# Altium PCB Export_PCB.PcbDoc (part 2 of 7)
Units mm, origin at the board's own origin, x right, y up, seen from the top; angles counter-clockwise.
Board outline 93 x 90 mm, 6 copper layers (Top_1, GND_2, SIGNAL_3, PWR_4, GND_5, Bottom_6), stack 1.606 mm thick; 470 components, 374 nets, 2145 pads, 1031 vias.
Unrouted connection lines stored in the file: 451.
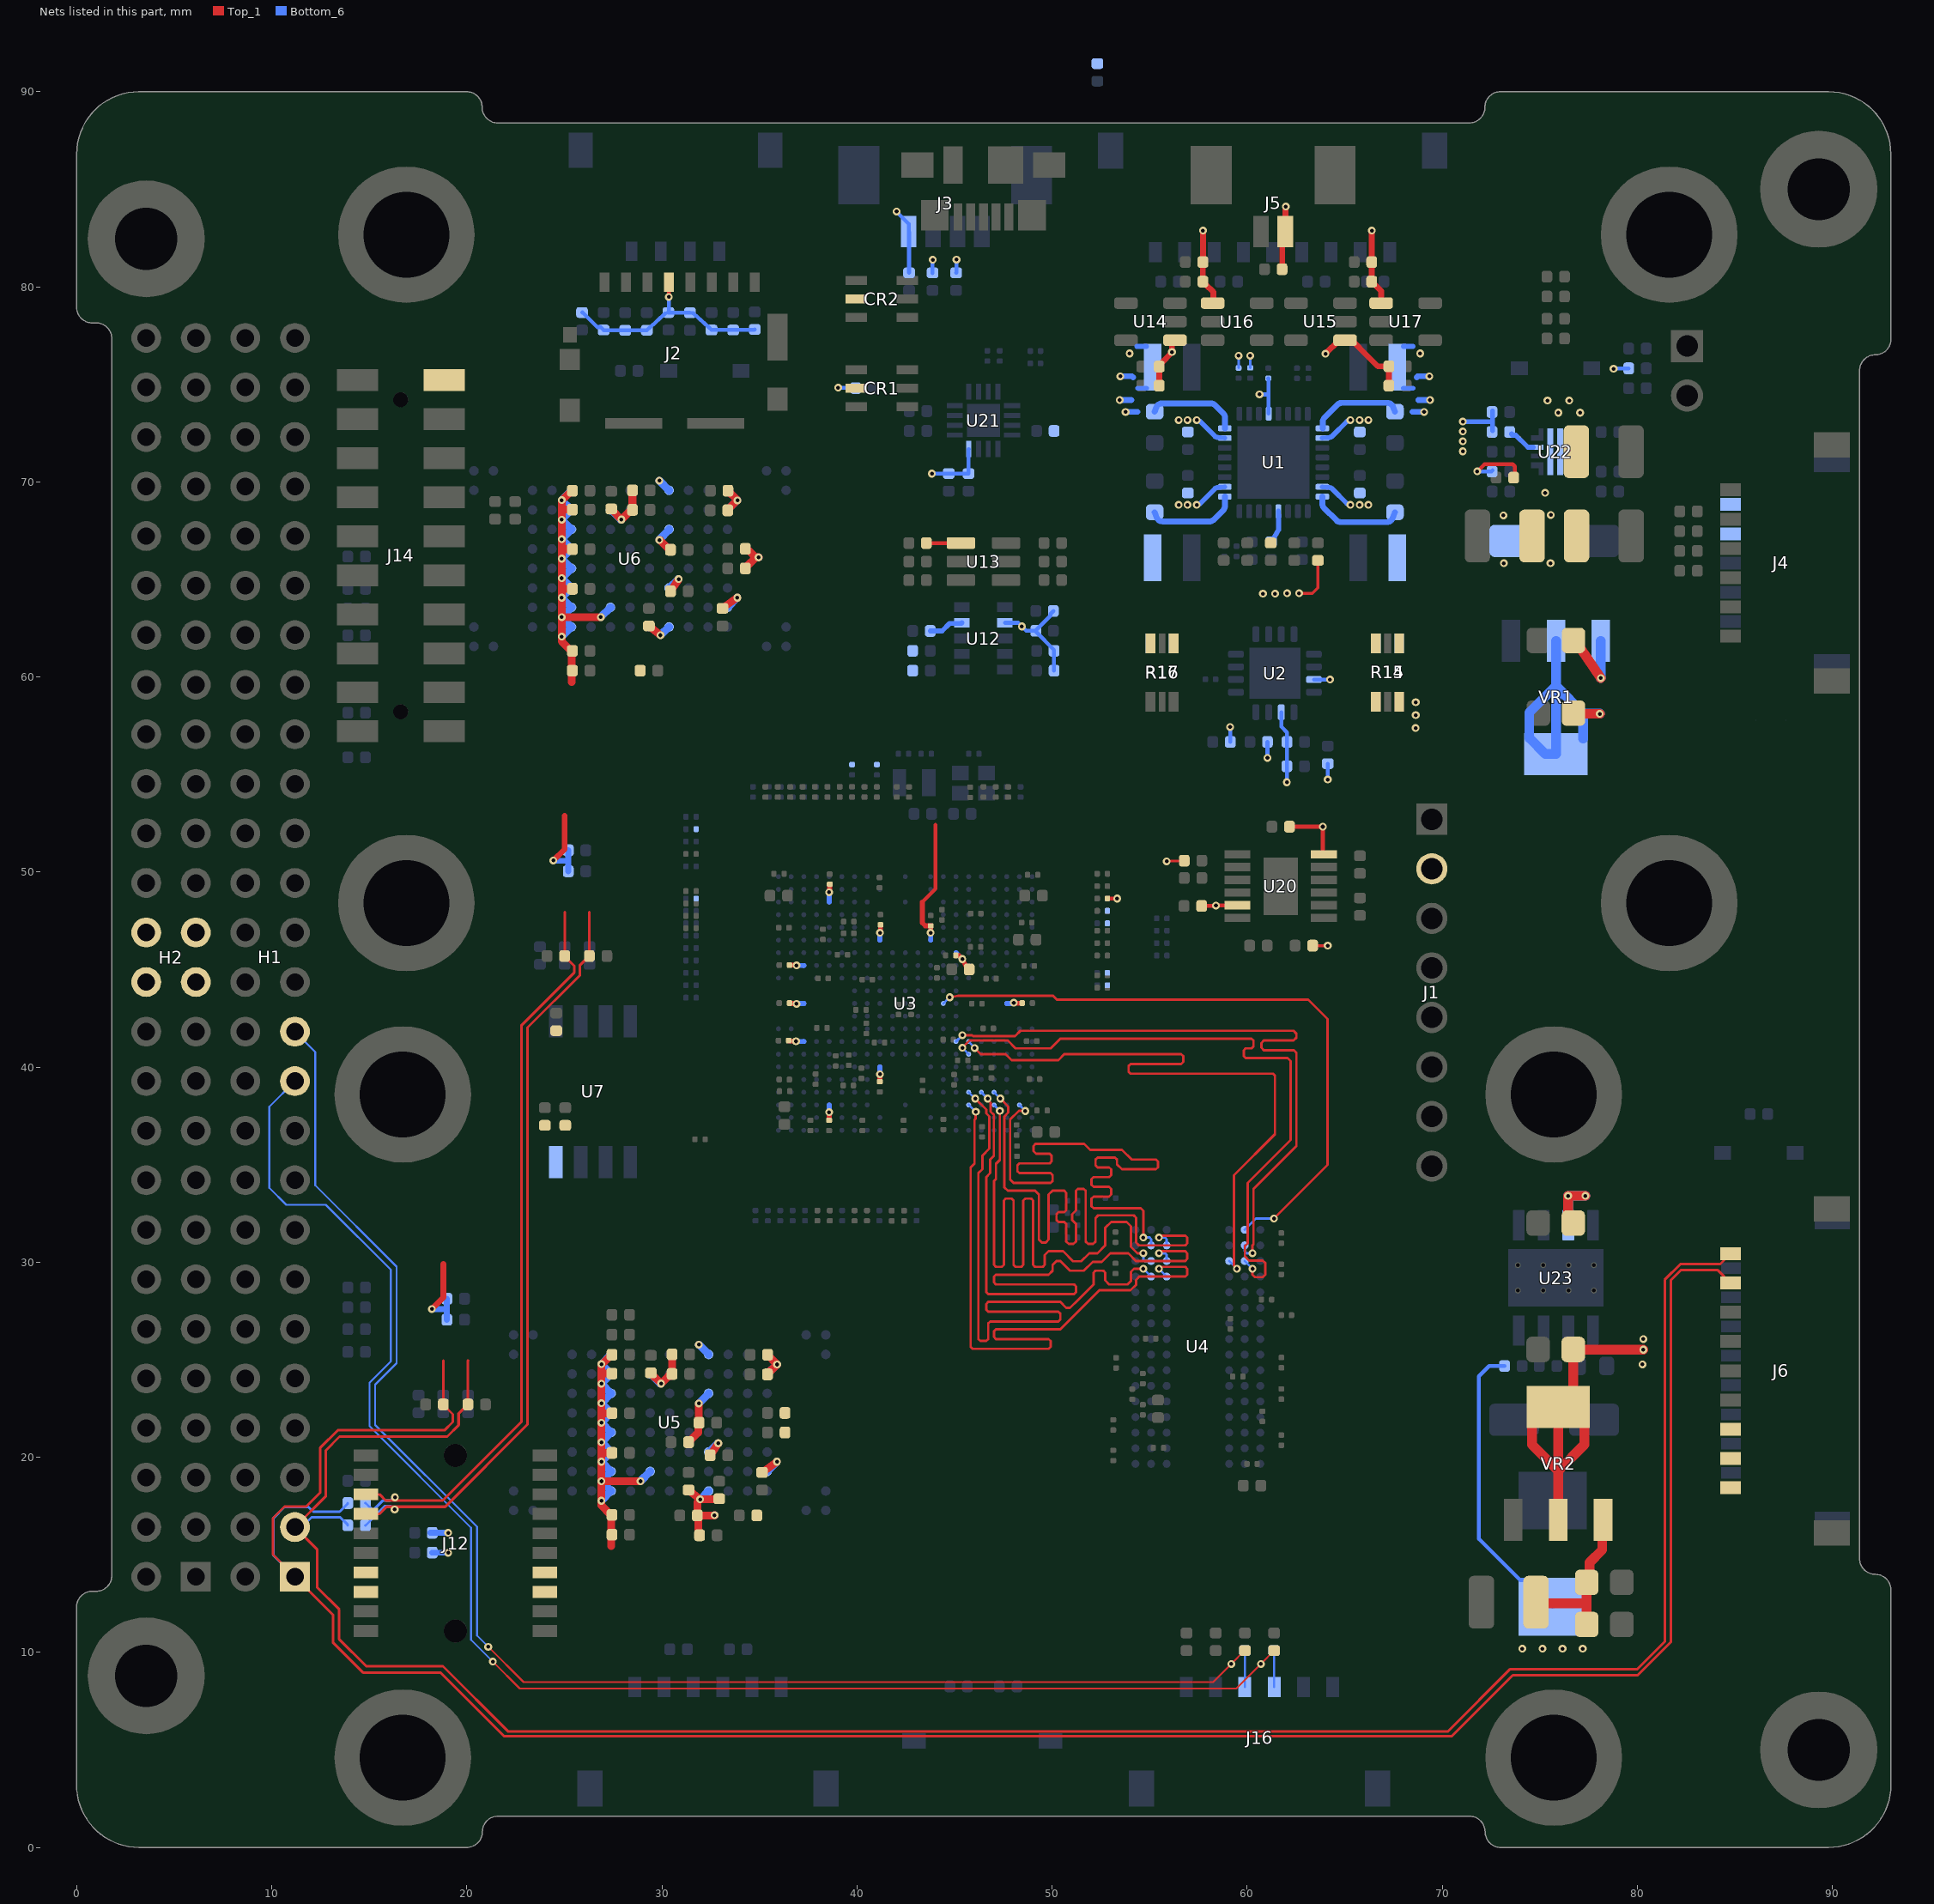
[diagram p5: the nets of this part, all layers, seen from the top]

## Footprints (in the part's own frame and the unit in brackets; to place one, negate y for a bottom-side part, rotate by r counter-clockwise, add the part's x,y. Pads: shape width x height; smd on the part's side, far side on the other; paste and mask are expansions set on the pad) (continued)
SAMTEC_ESQ-126-14-G-D [mm]
  rect 1.53x1.53 hole 0.9: 01(0,0)
  round 1.53 hole 0.9: 02(0,2.54) 03(2.54,0) 04(2.54,2.54) 05(5.08,0) 06(5.08,2.54) 07(7.62,0) 08(7.62,2.54) 09(10.16,0) 10(10.16,2.54) 11(12.7,0) 12(12.7,2.54) 13(15.24,0) 14(15.24,2.54) 15(17.78,0) 16(17.78,2.54) 17(20.32,0) 18(20.32,2.54) 19(22.86,0) 20(22.86,2.54) 21(25.4,0) 22(25.4,2.54) 23(27.94,0) 24(27.94,2.54) 25(30.48,0) 26(30.48,2.54) 27(33.02,0) 28(33.02,2.54) 29(35.56,0) 30(35.56,2.54) 31(38.1,0) 32(38.1,2.54) 33(40.64,0) 34(40.64,2.54) 35(43.18,0) 36(43.18,2.54) 37(45.72,0) 38(45.72,2.54) 39(48.26,0) 40(48.26,2.54) 41(50.8,0) 42(50.8,2.54) 43(53.34,0) 44(53.34,2.54) 45(55.88,0) 46(55.88,2.54) 47(58.42,0) 48(58.42,2.54) 49(60.96,0) 50(60.96,2.54) 51(63.5,0) 52(63.5,2.54)
  silkscreen extent -2.27,-1.2 65.03,3.74, body extent -1.52,-1.27 65.02,3.81, height 11.1
SAMTEC_FSI-110-03-X-D-AD-TR [mm]
  rect 0.61x1.26 smd: 01(-4.5,4.59) 02(-3.5,4.59) 03(-2.5,4.59) 04(-1.5,4.59) 05(-0.5,4.59) 06(0.5,4.59) 07(1.5,4.59) 08(2.5,4.59) 09(3.5,4.59) 10(4.5,4.59) 11(4.5,-4.59) 12(3.5,-4.59) 13(2.5,-4.59) 14(1.5,-4.59) 15(0.5,-4.59) 16(-0.5,-4.59) 17(-1.5,-4.59) 18(-2.5,-4.59) 19(-3.5,-4.59) 20(-4.5,-4.59)
  round 1.19 hole 1.19 unplated: ""(-4.5,0) ""(4.5,0)
  silkscreen extent -5.38,-4.38 5.38,5.9, body extent -5.38,-5 5.38,5, height 4.37
SOD123_MCC [mil]
  rect 34x28 smd paste+0: 1(-73,0) 2(73,0)
  silkscreen extent -88,-38 61,42, body extent -76,-33 76,33, height 53
SOIC127P790X216-8N [mm]
  rect 1.65x0.7 smd: 1(-3.6,1.905) 2(-3.6,0.635) 3(-3.6,-0.635) 4(-3.6,-1.905) 5(3.6,-1.905) 6(3.6,-0.635) 7(3.6,0.635) 8(3.6,1.905)
  silkscreen extent -4.27,-2.62 2.42,2.62, body extent -3.95,-2.62 3.95,2.62, height 2.16
SRP7050TA-220M [mm]
  rect 2.95x3.5 smd: 1(-2.725,0) 2(2.725,0)
  silkscreen extent -4.4,-3.3 4.4,3.3, body extent -3.65,-3.3 3.65,3.3, height 4.6
SW2-SMD [mm]
  rect 1.2x0.8 smd: 1(-3.5,0) 2(3.5,0)
  silkscreen extent -2.82,-1.85 2.82,1.85, body extent -3.05,-1.85 3.05,1.85, height 2.5
TFBGA-343_14X14 [mm] "BGA, 343-Leads, Body 14,00mm x14,00mm, Pitch 0,65mm"
  round 0.25 smd mask+0.05: A1(-6.5,6.5) A2(-5.85,6.5) A3(-5.2,6.5) A4(-4.55,6.5) A5(-3.9,6.5) A6(-3.25,6.5) A7(-2.6,6.5) A8(-1.95,6.5) A9(-1.3,6.5) A11(0,6.5) A13(1.3,6.5) A14(1.95,6.5) A15(2.6,6.5) A16(3.25,6.5) A17(3.9,6.5) A18(4.55,6.5) A19(5.2,6.5) A20(5.85,6.5) A21(6.5,6.5) AA1(-6.5,-6.5) AA2(-5.85,-6.5) AA3(-5.2,-6.5) AA4(-4.55,-6.5) AA5(-3.9,-6.5) AA6(-3.25,-6.5) AA7(-2.6,-6.5) AA8(-1.95,-6.5) AA9(-1.3,-6.5) AA11(0,-6.5) AA13(1.3,-6.5) AA14(1.95,-6.5) AA15(2.6,-6.5) AA16(3.25,-6.5) AA17(3.9,-6.5) AA18(4.55,-6.5) AA19(5.2,-6.5) AA20(5.85,-6.5) AA21(6.5,-6.5) B1(-6.5,5.85) B2(-5.85,5.85) B3(-5.2,5.85) B4(-4.55,5.85) B6(-3.25,5.85) B7(-2.6,5.85) B9(-1.3,5.85) B13(1.3,5.85) B15(2.6,5.85) B16(3.25,5.85) B18(4.55,5.85) B19(5.2,5.85) B20(5.85,5.85) B21(6.5,5.85) C1(-6.5,5.2) C2(-5.85,5.2) C3(-5.2,5.2) C4(-4.55,5.2) C5(-3.9,5.2) C6(-3.25,5.2) C7(-2.6,5.2) C8(-1.95,5.2) C11(0,5.2) C14(1.95,5.2) C15(2.6,5.2) C16(3.25,5.2) C17(3.9,5.2) C18(4.55,5.2) C19(5.2,5.2) C20(5.85,5.2) C21(6.5,5.2) D1(-6.5,4.55) D2(-5.85,4.55) D3(-5.2,4.55) D4(-4.55,4.55) D5(-3.9,4.55) D6(-3.25,4.55) D7(-2.6,4.55) D8(-1.95,4.55) D9(-1.3,4.55) D13(1.3,4.55) D14(1.95,4.55) D15(2.6,4.55) D16(3.25,4.55) D17(3.9,4.55) D18(4.55,4.55) D19(5.2,4.55) D20(5.85,4.55) D21(6.5,4.55) E1(-6.5,3.9) E3(-5.2,3.9) E4(-4.55,3.9) E5(-3.9,3.9) E6(-3.25,3.9) E7(-2.6,3.9) E8(-1.95,3.9) E14(1.95,3.9) E15(2.6,3.9) E16(3.25,3.9) E17(3.9,3.9) E18(4.55,3.9) E19(5.2,3.9) E21(6.5,3.9) F1(-6.5,3.25) F2(-5.85,3.25) F3(-5.2,3.25) F4(-4.55,3.25) F5(-3.9,3.25) F6(-3.25,3.25) F7(-2.6,3.25) F8(-1.95,3.25) F9(-1.3,3.25) F13(1.3,3.25) F14(1.95,3.25) F15(2.6,3.25) F16(3.25,3.25) F17(3.9,3.25) F18(4.55,3.25) F19(5.2,3.25) F20(5.85,3.25) F21(6.5,3.25) G1(-6.5,2.6) G2(-5.85,2.6) G3(-5.2,2.6) G4(-4.55,2.6) G5(-3.9,2.6) G6(-3.25,2.6) G7(-2.6,2.6) G8(-1.95,2.6) G9(-1.3,2.6) G10(-0.65,2.6) G11(0,2.6) G12(0.65,2.6) G13(1.3,2.6) G14(1.95,2.6) G15(2.6,2.6) G16(3.25,2.6) G17(3.9,2.6) G18(4.55,2.6) G19(5.2,2.6) G20(5.85,2.6) G21(6.5,2.6) H1(-6.5,1.95) H3(-5.2,1.95) H4(-4.55,1.95) H5(-3.9,1.95) H6(-3.25,1.95) H7(-2.6,1.95) H8(-1.95,1.95) H9(-1.3,1.95) H10(-0.65,1.95) H11(0,1.95) H12(0.65,1.95) H13(1.3,1.95) H14(1.95,1.95) H15(2.6,1.95) H16(3.25,1.95) H17(3.9,1.95) H18(4.55,1.95) H19(5.2,1.95) H21(6.5,1.95) J1(-6.5,1.3) J2(-5.85,1.3) J4(-4.55,1.3) J6(-3.25,1.3) J7(-2.6,1.3) J8(-1.95,1.3) J9(-1.3,1.3) J10(-0.65,1.3) J11(0,1.3) J12(0.65,1.3) J13(1.3,1.3) J14(1.95,1.3) J15(2.6,1.3) J16(3.25,1.3) J18(4.55,1.3) J20(5.85,1.3) J21(6.5,1.3) K7(-2.6,0.65) K8(-1.95,0.65) K9(-1.3,0.65) K10(-0.65,0.65) K11(0,0.65) K12(0.65,0.65) K13(1.3,0.65) K14(1.95,0.65) K15(2.6,0.65) L1(-6.5,0) L3(-5.2,0) L7(-2.6,0) L8(-1.95,0) L9(-1.3,0) L11(0,0) L13(1.3,0) L14(1.95,0) L15(2.6,0) L19(5.2,0) L21(6.5,0) M7(-2.6,-0.65) M8(-1.95,-0.65) M9(-1.3,-0.65) M10(-0.65,-0.65) M11(0,-0.65) M12(0.65,-0.65) M13(1.3,-0.65) M14(1.95,-0.65) M15(2.6,-0.65) N1(-6.5,-1.3) N2(-5.85,-1.3) N4(-4.55,-1.3) N6(-3.25,-1.3) N7(-2.6,-1.3) N8(-1.95,-1.3) N9(-1.3,-1.3) N10(-0.65,-1.3) N11(0,-1.3) N12(0.65,-1.3) N13(1.3,-1.3) N14(1.95,-1.3) N15(2.6,-1.3) N16(3.25,-1.3) N18(4.55,-1.3) N20(5.85,-1.3) N21(6.5,-1.3) P1(-6.5,-1.95) P3(-5.2,-1.95) P4(-4.55,-1.95) P5(-3.9,-1.95) P6(-3.25,-1.95) P7(-2.6,-1.95) P8(-1.95,-1.95) P9(-1.3,-1.95) P10(-0.65,-1.95) P11(0,-1.95) P12(0.65,-1.95) P13(1.3,-1.95) P14(1.95,-1.95) P15(2.6,-1.95) P16(3.25,-1.95) P17(3.9,-1.95) P18(4.55,-1.95) P19(5.2,-1.95) P21(6.5,-1.95) R1(-6.5,-2.6) R2(-5.85,-2.6) R3(-5.2,-2.6) R4(-4.55,-2.6) R5(-3.9,-2.6) R6(-3.25,-2.6) R7(-2.6,-2.6) R8(-1.95,-2.6) R9(-1.3,-2.6) R10(-0.65,-2.6) R11(0,-2.6) R12(0.65,-2.6) R13(1.3,-2.6) R14(1.95,-2.6) R15(2.6,-2.6) R16(3.25,-2.6) R17(3.9,-2.6) R18(4.55,-2.6) R19(5.2,-2.6) R20(5.85,-2.6) R21(6.5,-2.6) T1(-6.5,-3.25) T2(-5.85,-3.25) T3(-5.2,-3.25) T4(-4.55,-3.25) T5(-3.9,-3.25) T6(-3.25,-3.25) T7(-2.6,-3.25) T8(-1.95,-3.25) T9(-1.3,-3.25) T13(1.3,-3.25) T14(1.95,-3.25) T15(2.6,-3.25) T16(3.25,-3.25) T17(3.9,-3.25) T18(4.55,-3.25) T19(5.2,-3.25) T20(5.85,-3.25) T21(6.5,-3.25) U1(-6.5,-3.9) U3(-5.2,-3.9) U4(-4.55,-3.9) U5(-3.9,-3.9) U6(-3.25,-3.9) U7(-2.6,-3.9) U8(-1.95,-3.9) U14(1.95,-3.9) U15(2.6,-3.9) U16(3.25,-3.9) U17(3.9,-3.9) U18(4.55,-3.9) U19(5.2,-3.9) U21(6.5,-3.9) V1(-6.5,-4.55) V2(-5.85,-4.55) V3(-5.2,-4.55) V4(-4.55,-4.55) V5(-3.9,-4.55) V6(-3.25,-4.55) V7(-2.6,-4.55) V8(-1.95,-4.55) V9(-1.3,-4.55) V13(1.3,-4.55) V14(1.95,-4.55) V15(2.6,-4.55) V16(3.25,-4.55) V17(3.9,-4.55) V18(4.55,-4.55) V19(5.2,-4.55) V20(5.85,-4.55) V21(6.5,-4.55) W1(-6.5,-5.2) W2(-5.85,-5.2) W3(-5.2,-5.2) W4(-4.55,-5.2) W5(-3.9,-5.2) W6(-3.25,-5.2) W7(-2.6,-5.2) W8(-1.95,-5.2) W11(0,-5.2) W14(1.95,-5.2) W15(2.6,-5.2) W16(3.25,-5.2) W17(3.9,-5.2) W18(4.55,-5.2) W19(5.2,-5.2) W20(5.85,-5.2) W21(6.5,-5.2) Y1(-6.5,-5.85) Y2(-5.85,-5.85) Y3(-5.2,-5.85) Y4(-4.55,-5.85) Y6(-3.25,-5.85) Y7(-2.6,-5.85) Y9(-1.3,-5.85) Y13(1.3,-5.85) Y15(2.6,-5.85) Y16(3.25,-5.85) Y18(4.55,-5.85) Y19(5.2,-5.85) Y20(5.85,-5.85) Y21(6.5,-5.85)
  silkscreen extent -7.15,-7.15 7.15,7.15, body extent -7,-7 7,7, height 1.22
TPL5010DDCR [mm]
  rrect25% 1.45x0.59 smd: 1(-1.155,0.95) 2(-1.155,0) 3(-1.155,-0.95) 4(1.155,-0.95) 5(1.155,0) 6(1.155,0.95)
  silkscreen extent -2.5,-1.57 0.8,1.57, body extent -1.4,-1.45 1.4,1.45, height 1.1
TWBGA96_ISI [mm]
  round 0.406 smd paste+0 mask+0: A1(-3.2,6) A2(-2.4,6) A3(-1.6,6) A7(1.6,6) A8(2.4,6) A9(3.2,6) B1(-3.2,5.2) B2(-2.4,5.2) B3(-1.6,5.2) B7(1.6,5.2) B8(2.4,5.2) B9(3.2,5.2) C1(-3.2,4.4) C2(-2.4,4.4) C3(-1.6,4.4) C7(1.6,4.4) C8(2.4,4.4) C9(3.2,4.4) D1(-3.2,3.6) D2(-2.4,3.6) D3(-1.6,3.6) D7(1.6,3.6) D8(2.4,3.6) D9(3.2,3.6) E1(-3.2,2.8) E2(-2.4,2.8) E3(-1.6,2.8) E7(1.6,2.8) E8(2.4,2.8) E9(3.2,2.8) F1(-3.2,2) F2(-2.4,2) F3(-1.6,2) F7(1.6,2) F8(2.4,2) F9(3.2,2) G1(-3.2,1.2) G2(-2.4,1.2) G3(-1.6,1.2) G7(1.6,1.2) G8(2.4,1.2) G9(3.2,1.2) H1(-3.2,0.4) H2(-2.4,0.4) H3(-1.6,0.4) H7(1.6,0.4) H8(2.4,0.4) H9(3.2,0.4) J1(-3.2,-0.4) J2(-2.4,-0.4) J3(-1.6,-0.4) J7(1.6,-0.4) J8(2.4,-0.4) J9(3.2,-0.4) K1(-3.2,-1.2) K2(-2.4,-1.2) K3(-1.6,-1.2) K7(1.6,-1.2) K8(2.4,-1.2) K9(3.2,-1.2) L1(-3.2,-2) L2(-2.4,-2) L3(-1.6,-2) L7(1.6,-2) L8(2.4,-2) L9(3.2,-2) M1(-3.2,-2.8) M2(-2.4,-2.8) M3(-1.6,-2.8) M7(1.6,-2.8) M8(2.4,-2.8) M9(3.2,-2.8) N1(-3.2,-3.6) N2(-2.4,-3.6) N3(-1.6,-3.6) N7(1.6,-3.6) N8(2.4,-3.6) N9(3.2,-3.6) P1(-3.2,-4.4) P2(-2.4,-4.4) P3(-1.6,-4.4) P7(1.6,-4.4) P8(2.4,-4.4) P9(3.2,-4.4) R1(-3.2,-5.2) R2(-2.4,-5.2) R3(-1.6,-5.2) R7(1.6,-5.2) R8(2.4,-5.2) R9(3.2,-5.2) T1(-3.2,-6) T2(-2.4,-6) T3(-1.6,-6) T7(1.6,-6) T8(2.4,-6) T9(3.2,-6)
  silkscreen extent -5.31,-7.3 5.31,7.3, body extent -5.05,-7.05 5.05,7.05, height 1.2
UQFN-16_4X4_EP2.6X2.6 [mm]
  rrect50% 0.8x0.35 smd paste+0 mask+0.075: 1(-2,0.975) 2(-2,0.325) 3(-2,-0.325) 4(-2,-0.975) 9(2,-0.975) 10(2,-0.325) 11(2,0.325) 12(2,0.975)
  rrect50% 0.35x0.8 smd paste+0 mask+0.057: 5(-0.975,-2) 6(-0.325,-2) 7(0.325,-2) 8(0.975,-2) 13(0.975,2) 14(0.325,2) 15(-0.325,2) 16(-0.975,2)
  rect 2.6x2.6 smd paste-0.25 mask+0.075: 17(0,0)
  silkscreen extent -2.15,-2.15 2.15,2.15, body extent -2,-2 2,2, height 0.5
VQFN-HR-10 [mm]
  rect 0.65x0.3 smd: 1(-0.938,0.692) 4(-0.941,-0.708) 7(0.909,-0.708) 10(0.909,0.692)
  rect 0.25x0.65 smd: 1(-0.738,0.867) 4(-0.741,-0.883) 7(0.709,-0.883) 10(0.709,0.867)
  rect 0.65x0.25 smd: 2(-0.938,0.216) 3(-0.941,-0.233) 8(0.909,-0.233) 9(0.909,0.216)
  rect 0.3x2.4 smd: 5(-0.265,-0.008) 6(0.235,-0.007)
  silkscreen extent -1.3,-1.25 1.28,1.23, body extent -1.03,-1.01 0.97,0.99, height 1
VREG_LM1117MP-3.3/NOPB [mm]
  rect 2.15x0.95 smd: 1(-2.9,2.3) 2(-2.9,0) 3(-2.9,-2.3)
  rect 2.15x3.25 smd: 4(2.9,0)
  silkscreen extent -4.7,-3.25 1.75,3.25, body extent -3.5,-3.25 3.5,3.25, height 1.8
XTAL_ECS2401037B2JTNTR [mm]
  rect 0.85x0.75 smd paste+0 mask+0.102: 1(-0.675,-0.525) 2(0.675,-0.525) 3(0.675,0.525) 4(-0.675,0.525)
  silkscreen extent -0.78,-1.57 -0.58,-1.37, body extent -1,-0.8 1,0.8, height 0.5

## Part data
BT1: library part BT2, "Switch button 2 pin"
c C1 C2 C3 C4 C5 C6 C7 C10 C11 C12 C13 C14 C15 C16 C17 C18 C19 C20 C21 C22 C23 C24 C25 C26 C27 C28 C29 C30 C31 C32 C33 C34 C35 C36 C37 C38 C39 C40 C41 C42 C43 C44 C45 C46 C47 C48 C49 C50 C51 C52 C53 C54 C55 C56 C57 C58 C59 C60 C61 C62 C63 C64 C65 C66 C67 C68 C69 C70 C71 C72 C73 C74 C75 C76 C77 C78 C79 C80 C81 C82 C83 C84 C85 C86 C87 C88 C89 C90 C91 C92 C93 C94 C95 C96 C97 C98 C99 C100 C101 C102 C103 C104 C105 C106 C107 C108 C109 C110 C111 C112 C113 C114 C115 C116 C117 C118 C119 C120 C121 C122 C123 C124 C125 C126 C127 C128 C129 C130 C131 C132 C133 C134 C135 C136 C143 C144 C145 C146 C147 C148 C149 C150 C151 C153 C154 C155 C156 C158 C159 C160 C161 C162 C163 C164 C168 C169 C170 C171 C176 C181 C182: library part _CAP_C_2, "CAP CHIP"
C165 C166 C167 C173 C174 C175 C177 C178 C179 C180: library part _CAP_C_High_2, "CAP CHIP High Value"
CR1 CR2: "TVS DIODE 5.5VWM 6TSOP", Manufacturer_Name=Nexperia, Copyright="Copyright (C) 2025 Ultra Librarian. All rights reserved.", Manufacturer_Part_Number=IP4220CZ6,125, RefDes=RefDes, TYPE=Type
D5 D7: "DIODE SCHOTTKY 40V 5A SMA", MPN=SS34, Solder=SMT
D6 D11 D13: "Description", Manufacturer_Name=MCC, Copyright="Copyright (C) 2026 Ultra Librarian. All rights reserved.", Manufacturer_Part_Number=1N4148W-TP
H1 H2: "CONN SOCKET 52POS 0.1 GOLD PCB", Package=None, Availability=Unavailable, MF=Samtec, MP=ESQ-126-14-G-D, Price=None
H3 H4 H5 H6 H7 H8 H9 H10: library part M4.4, "WA-SMSI SMT Steel Spacer with / internal Thread"
J2: "9 (8 + 1) Position Card Connector Secure Digital - microSDâ„¢ Surface Mount, Right Angle Gold", Package=None, Check_prices=https://www.snapeda.com/parts/1051620001/Molex/view-part/?ref=eda, MF=Molex, MP=1051620001, SnapEDA_Link=https://www.snapeda.com/parts/1051620001/Molex/view-part/?ref=snap
J3 J13: library part "Header 4x1_2M"
J4: "1.50mm Pitch, Pico-Lock PCB Header, Single Row, Right-Angle, Surface Mount, Gold (Au) Plating, Positive Lock, 5 Circuits, Tape and Reel", Manufacturer_Name="Molex Connector Corporation", Copyright="Copyright (C) 2025 Ultra Librarian. All rights reserved.", Manufacturer_Part_Number=5040500591, RefDes=RefDes, TYPE=Type
J5: library part "Header 2x1_2M"
J6 J11: "Connector Header Surface Mount, Right Angle 9 position 0.059\" (1.50mm)"
J7: "Connector Header Surface Mount, Right Angle 8 position 0.059\" (1.50mm)`"
J8 J15 J16: "1.50mm Pitch, Pico-Lock PCB Header, Single Row, Right-Angle, Surface Mount, Gold (Au) Plating, Positive Lock, 6 Circuits, Tape and Reel", Manufacturer_Name="Molex Connector Corporation", Copyright="Copyright (C) 2025 Ultra Librarian. All rights reserved.", Datasheet=https://www.molex.com/en-us/products/part-detail-pdf/5040500691?display=pdf, Manufacturer_Part_Number=5040500691, RefDes=RefDes, TYPE=Type
J12: library part FSI-110-03-X-D-AD-TR, "CONN STACKING 20POS SMD GOLD", Package=None, Availability=Unavailable, MP=FSI-110-03-X-D-AD-TR, Price=None
J14: library part SAMTEC-TLE-110-01-X-DV-A, "CONN RCPT 20POS 0.079 GOLD SMD", Package=None, Availability=Unavailable, MP=SAMTEC-TLE-110-01-X-DV-A, Price=None
L1 L2 L3 L4: library part DFE252012P-1R5M=P2, "Fixed Inductor 1.5uH 3.5A R060 SMD", Package=None, Availability=Unavailable, MP=DFE252012P-1R5M=P2, Price=None
L5: library part _IND, "FIXED IND 22UH 2.5A 170 MOHM SMD"
R1 R2 R3 R4 R5 R6 R7 R8 R9 R11 R12 R13 R18 R19 R20 R21 R22 R23 R24 R25 R26 R27 R28 R29 R30 R31 R32 R33 R34 R35 R36 R37 R38 R39 R40 R41 R42 R43 R44 R45 R46 R47 R48 R49 R50 R51 R52 R53 R54 R55 R56 R57 R58 R59 R60 R61 R62 R63 R64 R65 R66 R67 R68 R69 R70 R71 R72 R73 R74 R75 R76 R77 R78 R79 R80 R81 R82 R83 R84 R85 R86 R87 R88 R89 R90 R91 R92 R93 R94 R95 R96 R97 R98 R99 R100 R101 R102 R103 R104 R105 R106 R107 R108 R109 R110 R111 R112 R113 R114 R115 R116 R117 R118 R119 R120 R121 R122 R123 R124 R125 R126 R127 R128 R129 R130 R131 R132 R133 R134 R135 R136 R137 R138 R139 R140 R141 R142 R143 R144 R145 R146 R147 R148 R149 R150 R151 R152 R153 R154 R155 R156 R157 R159 R160 R164 R165 R166 R167 R168 R169 R170 R171 R172 R173 R174 R175 R176 R177 R178 R179 R180 R181 R182 R184 R185 R186 R187 R188 R191 R192 R193 R194 R195 R196 R197 R198 R199 R200 R201 R203 R204 R205 R206 R207 R208 R210 R211 R214 R215 R216 R217 R218 R219 R220 R221 R222 R223 R224 R225 R226 R227 R228 R229 R230 R231 R232 R234 R235 R236 R237 R238 R239 R240 R241 R242 R243: library part _RES_B_2, "RES"
R14 R15 R16 R17: library part SHUNT, "Shunt Resistor, RES 0.047 OHM 1% 3/4W 1206", Current=4A, Manufacturer 1=SUSUMU, Manufacturer Part Number 1=KRL1632E-M-R047-F-T5, Operating Temperature="-55C to 155C", Package=1206, Power=3/4W, Supplier Part Number 1=408-1578-2-ND, Temperature Coefficient=±50ppm/C, Tolerance=1%, Category=Resistor, ComponentLink1Description="SVN Datasheet", ComponentLink1URL=https://chn-vm-apps.microchip.com/mchprepo/parts/Datasheets/n_catalog_partition09_en.pdf, ComponentLink2Description="Local Datasheet", ComponentLink2URL=C:\ALTIUM_WORK\00001_MCHP-CDB\Datasheets\n_catalog_partition09_en.pdf, ComponentLink3Description="Open Symbol", ComponentLink3URL="C:\ALTIUM_WORK\00001_MCHP-CDB\Library\LibraryRefs\Shunt 4 Pin.SchLib", ComponentLink4Description="Open Footprint", ComponentLink4URL=C:\ALTIUM_WORK\00001_MCHP-CDB\Library\Footprints\RES_C_1206_SHUNT.PcbLib, ComponentLink5Description="Open Footprint 2", ComponentLink6Description="Open Footprint 3", ComponentLink7Description="Open Footprint 4", Composition=MF, Description_="RES SHUNT MF 0.047R 1% 3/4W SMD 1206", Dev Tools Status=Design, MCHP-ID=RSMT1405, Owner="Ciprian Abramov", Populated=YES, Quantity Override=1, Restricted Sourcing=No, Revision=1, Status="MCL Design", Supplier 1=Digi-Key, Symbol="Shunt 4 Pin", TYPE=Shunt
U1: library part MIC8878, Manufacturer 1="Microchip Technology", Manufacturer Part Number 1=MCP16502TAB-E/S8B, Supplier Part Number 1=150-MCP16502TAB-E/S8BCT-ND, Category=MCHP-Analog, ComponentLink1Description="SVN Datasheet", ComponentLink2Description="Local Datasheet", ComponentLink2URL=C:\ALTIUM_WORK\00001_MCHP-CDB\Datasheets\MCP16502-High-Performance-PMIC-for-SAMA5DX-SAM9X6-MPUs-Data-Sheet-DS20006275B.pdf, ComponentLink3Description="Open Symbol", ComponentLink3URL="C:\ALTIUM_WORK\00001_MCHP-CDB\Library\LibraryRefs\MCP16502 QFN-32.SchLib", ComponentLink4Description="Open Footprint", ComponentLink4URL=C:\ALTIUM_WORK\00001_MCHP-CDB\Library\Footprints\QFN-32_5X5_EP3.7X3.7.PcbLib, ComponentLink5Description="Open Footprint 2", ComponentLink6Description="Open Footprint 3", ComponentLink7Description="Open Footprint 4", Description_="MCHP ANALOG PMIC SWITCHER Buck ADJ MCP16502TAB-E/S8B QFN-32 for SAMA7G5 MPU with LPDDR/DDR2/DDR3", Dev Tools Status=Design, MCHP-ID=MIC8878, Owner="Dragos Danaila", Populated=YES, Quantity Override=1, Revision=1, Status="MCL Design", Supplier 1=Digi-Key, Symbol="MCP16502 QFN-32", TYPE=Switcher
U2: library part PAC1934T-I/JQ, "IC CURRENT MONITOR 1% 16UQFN", Manufacturer 1="Microchip Technology", Operating Temperature="-40C to +85C", Category=MCHP-Analog, ComponentLink1Description="SVN Datasheet", ComponentLink1URL=https://www.microchip.com/sitesearch/search/Product%20and%20Development%20Tools/PAC1934T-I/JQ, ComponentLink2Description="Local Datasheet", ComponentLink3Description="Open Symbol", ComponentLink3URL="C:\ALTIUM_WORK\00001_MCHP-CDB\Library\LibraryRefs\PAC1934 UQFN-16.SchLib", ComponentLink4Description="Open Footprint", ComponentLink4URL=C:\ALTIUM_WORK\00001_MCHP-CDB\Library\Footprints\UQFN-16_4X4_EP2.6X2.6.PcbLib, ComponentLink5Description="Open Footprint 2", ComponentLink6Description="Open Footprint 3", ComponentLink7Description="Open Footprint 4", Description_="MCHP ANALOG POWER CURRENT SENSE MONITOR PAC1934T-I/JQ UQFN-16", Dev Tools Status=Production, Manufacturer Part Number 1=PAC1934T-I/JQ, MCHP-ID=MIC7010, Owner="Razvan Cristescu", Populated=YES, Quantity Override=1, Restricted Sourcing=No, Revision=2, Status="MCL Design", Supplier 1="Microchip Technology", Supplier Part Number 1=PAC1934T-I/JQ, Symbol="PAC1934 UQFN-16", TYPE="Power/Current Sensor"
U3: "SAMA7D65 MPU 1000MHz Cortex-A7 TFBGA-343", Manufacturer 1="Microchip Technology", Manufacturer Part Number 1=SAMA7D65-V/4HB-SL3, Operating Temperature="-40C to +105C", Category=MCHP-Microcontroller, ComponentLink1Description="SVN Datasheet", ComponentLink1URL=https://www.microchip.com/sitesearch/search/Product%20and%20Development%20Tools/SAMA7D65-V/4HB-SL3, ComponentLink2Description="Local Datasheet", ComponentLink3Description="Open Symbol", ComponentLink3URL=C:\ALTIUM_WORK\00001_MCHP-CDB\Library\LibraryRefs\SAMA7D65-TFBGA-343.SchLib, ComponentLink4Description="Open Footprint", ComponentLink4URL=C:\ALTIUM_WORK\00001_MCHP-CDB\Library\Footprints\TFBGA-343_14x14.PcbLib, ComponentLink5Description="Open Footprint 2", ComponentLink6Description="Open Footprint 3", ComponentLink7Description="Open Footprint 4", Description_="MCHP MPU 32-BIT Cortex-A7 1000MHz 128kB SAMA7D65-V/4HB-SL3 TFBGA-343", Dev Tools Status=Design, MCHP-ID=IC2674, Owner="Ciprian Abramov", Populated=YES, Quantity Override=1, Restricted Sourcing=No, Revision=1, Status="MCL Design", Supplier 1="Microchip Technology", Supplier Part Number 1=SAMA7D65-V/4HB-SL3, Symbol=SAMA7D65-TFBGA-343, TYPE="32-Bit MPU"
U4: library part IC_RAM_IS43TR16512BL-125KBLI, "DDR3L", Manufacturer_Name=ISSI, Copyright="Copyright (C) 2025 Ultra Librarian. All rights reserved.", Manufacturer_Part_Number=IS43TR16512BL-125KBLI, RefDes=RefDes, TYPE=Type
U7: "MRAM Avalanche High Performance Serial P-SRAM 4Mb in SOIC8 package with QSPI - 108MHz interface, 3V, -40 C to 105 C", Manufacturer_Name="Avalanche Technology", Mouser Part Number=793-30042040108X0PSY, Datasheet Link=https://www.mouser.ph/ProductDetail/Avalanche-Technology/AS3004204-0108X0PSAY?qs=eP2BKZSCXI7G0ggegRejGg%3D%3D, Geometry.Height=2.16mm, Manufacturer_Part_Number=AS3004204-0108X0PSAY, Mouser Price/Stock=https://www.mouser.co.uk/ProductDetail/Avalanche-Technology/AS3004204-0108X0PSAY/?qs=eP2BKZSCXI7G0ggegRejGg%3D%3D
U8: "Micro-USB B Receptacle with Flange, Bottom Mount, Surface Mount, Lead-Free", Manufacturer_Name="Molex Connector Corporation", Copyright="Copyright (C) 2025 Ultra Librarian. All rights reserved.", Manufacturer_Part_Number=473460001, RefDes=RefDes, TYPE=Type
U12: "Real-Time Clock Module with I2C-Bus", Package=None, Availability=Unavailable, MP=RV-3129-C3-32.768KHZ-OPTION-A-TB-QA, Price=None
U13: "OSC PROG TIMER TSOT23-6"
U14 U15: "Automotive LVDS Differential Driver"
U16 U17: "Automotive LVDS Differential Line Receiver"
U20: library part LTC2865HMSETRPBF, "Â±60V Fault Protected 3V to 5.5V RS485/RS422 Transceivers", Manufacturer_Name="Analog Devices Inc", Copyright="Copyright (C) 2025 Ultra Librarian. All rights reserved.", Manufacturer_Part_Number=LTC2865HMSE#TRPBF, RefDes=RefDes, TYPE=Type
U21: library part IC_USB_SW_FSUSB74MPX, "USB Switch IC 1 Channel 16-MLP (3x3)", Package="WQFN-16 ON Semiconductor", Check_prices=https://www.snapeda.com/parts/FSUSB74MPX/Onsemi/view-part/?ref=eda, MF="ON Semiconductor", MP=FSUSB74MPX, SnapEDA_Link=https://www.snapeda.com/parts/FSUSB74MPX/Onsemi/view-part/?ref=snap
U23: "5.5V to 36V Input, 3A, 500kHz Step-Down Converter", Package="HSOIC-8 Texas Instruments", Availability="In Stock", Check_prices=https://www.snapeda.com/parts/TPS5430DDAR/Texas+Instruments/view-part/?ref=eda, MF="Texas Instruments", MP=TPS5430DDAR, Price=None, Purchase-URL=https://pricing.snapeda.com/search/part/TPS5430DDAR/?ref=eda, SnapEDA_Link=https://www.snapeda.com/parts/TPS5430DDAR/Texas+Instruments/view-part/?ref=snap
VR1 VR2: "800-mA 15-V linear voltage regulator", Package="SOT-223-4 Texas Instruments", Check_prices=https://www.snapeda.com/parts/LM1117MP-3.3/NOPB/Texas+Instruments/view-part/?ref=eda, MF="Texas Instruments", MP=LM1117MP-3.3/NOPB, SnapEDA_Link=https://www.snapeda.com/parts/LM1117MP-3.3/NOPB/Texas+Instruments/view-part/?ref=snap
Y1: library part ECS-240-10-37B2-JTN-TR, "CRYSTAL 24 MHZ 10PF SMD", Load Capacitance=10pF, Manufacturer 1="ECS Inc", Operating Temperature="-40C to +85C", Package=L2.0W1.6H0.5, Supplier Part Number 1=50-ECS-240-10-37B2-JTN-TR-ND, Tolerance=20ppm, Category=Crystal/Oscillator, ComponentLink1Description="SVN Datasheet", ComponentLink1URL=https://chn-vm-apps.microchip.com/mchprepo/parts/Datasheets/ECX-1637B2.pdf, ComponentLink2Description="Local Datasheet", ComponentLink2URL=C:\ALTIUM_WORK\00001_MCHP-CDB\Datasheets\ECX-1637B2.pdf, ComponentLink3Description="Open Symbol", ComponentLink3URL="C:\ALTIUM_WORK\00001_MCHP-CDB\Library\LibraryRefs\Crystal 4 Pins.SchLib", ComponentLink4Description="Open Footprint", ComponentLink4URL=C:\ALTIUM_WORK\00001_MCHP-CDB\Library\Footprints\CRYSTAL_L2.0W1.6H0.5_FA-128.PcbLib, ComponentLink5Description="Open Footprint 2", ComponentLink6Description="Open Footprint 3", ComponentLink7Description="Open Footprint 4", Description_="CRYSTAL 24MHz 10pF SMD L2W1.6H0.5", Dev Tools Status=Design, Manufacturer Part Number 1=ECS-240-10-37B2-JTN-TR, MCHP-ID=OSC1299, Owner="Ciprian Abramov", Populated=YES, Quantity Override=1, Revision=1, Status="MCL Design", Supplier 1=Digi-Key, Symbol="Crystal 4 Pins", TYPE=Crystal
Y2: library part "FC-12M 32.7680KA-A3", "CRYSTAL 32.7680KHZ 12.5PF SMD", Load Capacitance=12.5pF, Manufacturer 1=Epson, Operating Temperature="-40°C ~ 85°C", Package="2-SMD, No Lead", Supplier Part Number 1=SER3672CT-ND, Tolerance=20ppm, Category=Crystal/Oscillator, ComponentLink1Description="SVN Datasheet", ComponentLink1URL=https://chn-vm-apps.microchip.com/mchprepo/parts/Datasheets/FC-12D_en.pdf, ComponentLink2Description="Local Datasheet", ComponentLink2URL=C:\ALTIUM_WORK\00001_MCHP-CDB\Datasheets\FC-12D_en.pdf, ComponentLink3Description="Open Symbol", ComponentLink3URL="C:\ALTIUM_WORK\00001_MCHP-CDB\Library\LibraryRefs\Crystal 2 Pins.SchLib", ComponentLink4Description="Open Footprint", ComponentLink4URL=C:\ALTIUM_WORK\00001_MCHP-CDB\Library\Footprints\CRYSTAL_FC-12M_L2.05W1.2H0.6.PcbLib, ComponentLink5Description="Open Footprint 2", ComponentLink6Description="Open Footprint 3", ComponentLink7Description="Open Footprint 4", Description_="CRYSTAL 32.768KHZ 12.5PF SMD 2-SMD, No Lead, FC-12M 32.7680KA-A3", Dev Tools Status=Design, Manufacturer Part Number 1="FC-12M 32.7680KA-A3", MCHP-ID=OSC1269, Owner="Dragos Danaila", Populated=YES, Quantity Override=1, Revision=1, Status="MCL Design", Supplier 1=Digikey, Symbol="Crystal 2 Pins", TYPE=Crystal

## Via types
v1: diameter 0.4, hole 0.2, Top_1 to Bottom_6, 870 vias
v2: diameter 0.4, hole 0.2, Top_1 to Bottom_6, tented both sides, 160 vias
v3: diameter 0.4, hole 0.15, Top_1 to Bottom_6, 1 vias

## Nets (pads, with @x,y where several pads share a name; then routed paths per layer and width w, separated by ;. In a path a pad name is that pad's centre, name@x,y a point inside that pad or via, vN(x,y) a via of type N, cw(c..) or ccw(c..) an arc to the next point about the centre after c; other vN are vias at no path point)
3.3_VBAT: C144.2 C176.1 J5.1 R28.1 U12.9 | length 5.1
  Top_1 w0.3: C176.1@61.791,80.899 61.801,80.909 61.801,82.668 J5.1@61.958,82.825 61.972,82.84 61.972,84.096 v1(61.987,84.11)
  Bottom_6 w0.254: C144.2@43.757,62.357 44.362,62.357 44.75,62.745 45.351,62.745 U12.9@45.382,62.776
3V3: C6.2 C7.2 C41.2 C42.2 C43.2 C44.2 C47.2 C48.2 C49.2 C50.2 C51.2 C130.2 C131.2 C132.2 C134.2 C135.2 C136.2 C143.2 C145.2 C163.2 C164.2 CR1.5 CR2.5 J1.2 J2.P4 J3.1 R4.1 R5.1 R7.2 R8.2 R9.2 R14.2 R18.1 R19.1 R36.1 R43.1 R51.1 R52.1 R54.1 R57.1 R122.1 R150.2 R151.2 R152.2 R153.2 R154.2 R155.2 R156.2 R157.1 R159.1 R160.1 R164.1 R165.1 R166.1 R197.2 U2.2 U2.15 U3.C17 U3.F13 U3.G7 U3.H19 U3.L3 U3.L19 U3.P19 U3.T13 U7.8 U12.2 U13.1 U21.4 | length 43.5
  Top_1 w0.2: v1(30.357,79.478) J2.P4@30.357,80.226 ; C145.2@43.561,66.863 U13.1@45.327,66.863 ; R19.1@52.84,48.641 v1(53.34,48.641)
  Top_1 w0.25: C51.2@36.501,41.358 36.501,41.354 36.513,41.341 36.858,41.341 v1(36.875,41.324) ; C49.2@36.543,43.283 36.543,43.273 36.556,43.261 36.881,43.261 v1(36.903,43.239) ; C42.2@36.543,45.233 36.554,45.222 36.893,45.222 v1(36.903,45.212) ; v1(38.578,48.962) 38.6,48.984 C44.2@38.6,49.365 ; C47.2@41.174,39.256 41.174,39.633 v1(41.178,39.637) ; v1(41.178,46.887) 41.204,46.913 41.204,47.29 C41.2@41.206,47.295 ; C48.2@45.075,45.741 45.199,45.741 v1(45.403,45.537) 45.647,45.087 C50.2@45.728,44.937 ; v1(48.04,43.303) 48.069,43.274 48.429,43.274 C43.2@48.441,43.262
  Bottom_6 w0.127: R8.2@59.563,75.836 v1(59.563,76.462) ; R7.2@60.16,75.842 v1(60.16,76.468)
  Bottom_6 w0.2: R156.2@25.908,78.682 25.933,78.682 26.681,77.934 26.863,77.934 R152.2@27.015,77.782 27.018,77.778 29.225,77.778 R155.2@29.228,77.775 29.389,77.912 30.163,78.629 cw(c30.299,78.482) 30.173,78.637 C130.2@30.335,78.682 ; v1(30.357,79.478) 30.357,78.819 C130.2@30.335,78.682 ; R151.2@34.762,77.811 34.748,77.796 32.563,77.796 R154.2@32.549,77.782 32.411,77.92 31.645,78.616 ccw(c31.51,78.468) 31.604,78.644 C132.2@31.442,78.668 31.279,78.68 30.498,78.68 C130.2@30.335,78.682 ; v1(39.04,74.828) 39.052,74.816 39.923,74.816 C131.2@39.936,74.803 ; v1(42.034,83.86) 42.034,83.842 42.651,83.225 J3.1@42.651,82.825 42.672,82.804 C136.2@42.672,80.714 ; v1(43.847,70.419) 43.851,70.423 44.7,70.423 C163.2@44.704,70.427 C164.2@45.72,70.427 45.726,70.433 45.726,71.676 U21.4@45.732,71.682 ; R159.1@43.869,80.705 R159.1@43.878,80.714 43.878,81.376 v1(43.888,81.385) ; R160.1@45.085,80.714 45.094,80.723 45.094,81.385 v1(45.104,81.395) ; U12.2@47.582,62.776 48.265,62.776 v1(48.455,62.586) 48.678,62.363 C143.2@49.168,62.363 ; R166.1@50.068,63.379 49.916,63.227 49.916,63.136 49.168,62.388 C143.2@49.168,62.363 ; R51.1@50.107,60.325 R164.1@50.107,61.341 50.107,61.383 49.168,62.321 C143.2@49.168,62.363 ; v1(59.13,57.431) 59.134,57.427 59.134,56.672 R4.1@59.139,56.668 ; v1(61.044,55.848) R5.1@61.044,56.668 ; U2.2@61.752,58.192 61.752,57.451 62.049,57.154 C6.2@62.049,56.668 62.044,56.663 62.044,55.428 C7.2@62.039,55.423 v1(62.039,54.603) ; U2.15@63.427,59.867 v1(64.247,59.867) ; v1(64.135,54.737) R9.2@64.135,55.557
  Bottom_6 w0.25: v1(36.875,41.324) 36.887,41.312 U3.P19@37.278,41.312 ; v1(36.903,43.239) 36.926,43.262 U3.L19@37.278,43.262 ; v1(36.903,45.212) U3.H19@37.278,45.212 ; U3.C17@38.578,48.462 v1(38.578,48.962) ; v1(41.178,39.637) U3.T13@41.178,40.012 ; U3.F13@41.178,46.512 v1(41.178,46.887) ; U3.G7@45.078,45.862 v1(45.403,45.537) ; U3.L3@47.678,43.262 47.894,43.262 47.905,43.274 48.012,43.274 v1(48.04,43.303)
  other v1: 68.637,57.381 68.644,58.041 68.644,58.702
3V3_COM: C133.2 C146.2 C147.2 C148.2 C149.2 C150.2 C151.2 C153.2 C154.2 C155.2 C158.2 C161.2 C162.2 C178.2 c.2 J12.03 J12.04 J12.17 J12.18 J14.2 R45.2 R47.2 R191.2 R192.2 U14.1 U15.1 U16.1 U17.1 U20.5 U20.12 VR1.2 VR1.4 | length 49.2
  Top_1 w0.15: v1(55.88,50.546) 55.898,50.564 56.761,50.564 R192.2@56.779,50.581 ; R191.2@63.359,46.228 v1(64.135,46.228)
  Top_1 w0.2: C161.2@57.667,48.259 57.677,48.269 58.392,48.269 v1(58.402,48.28) 59.485,48.28 U20.5@59.506,48.301 ; C162.2@62.172,52.324 v1(63.881,52.324) 63.881,50.959 U20.12@63.938,50.902
  Top_1 w0.3: v1(18.215,27.601) 18.796,28.182 18.796,29.902 ; v1(24.438,50.588) 25.019,51.169 25.019,52.889 ; C133.2@55.497,74.93 C147.2@55.497,75.909 55.622,76.034 55.622,76.102 v1@56.147,76.627 ; v1(56.147,76.653) 56.147,77.116 U14.1@56.258,77.226 ; C148.2@57.735,81.265 57.735,80.239 57.86,80.114 57.885,80.114 58.269,79.73 58.269,79.192 U16.1@58.237,79.161 ; C148.2@57.737,81.266 v1@57.737,82.878 ; v1(64.018,76.565) 64.713,77.261 U15.1@65.023,77.261 65.168,77.116 65.51,77.116 66.048,76.578 66.705,75.921 C149.2@67.266,75.921 C146.2@67.266,74.93 ; v1(66.395,82.883) 66.392,82.879 66.392,81.268 C150.2@66.388,81.265 C153.2@66.388,80.264 66.388,80.239 66.513,80.114 66.538,80.114 66.873,79.779 U17.1@66.873,79.161
  Top_1 w0.5: C178.2@76.736,58.446 77.072,58.11 v1(78.08,58.11)
  Bottom_6 w0.3: R47.2@18.131,16.129 v1@19.023,16.129 ; v1(18.215,27.601) 18.227,27.588 18.981,27.588 ; R45.2@18.23,15.113 18.237,15.106 19.043,15.106 v1(19.05,15.099) ; C154.2@18.981,27.051 18.981,27.588 ; C155.2@18.981,28.125 18.981,27.588 ; v1(24.438,50.588) 24.45,50.575 25.204,50.575 ; c.2@25.204,50.038 25.204,50.575 ; C158.2@25.204,51.112 25.204,50.575
  Bottom_6 w0.5: 75.833,59.662 75.833,59.546 ; VR1.2@75.833,61.849 75.833,59.546 ; 75.858,59.506 77.229,58.134 VR1.4@77.229,56.834 ; 77.229,58.114 v1@78.076,58.114 ; 75.833,59.546 74.462,58.175 74.462,56.874 75.287,56.049 VR1.4@75.833,56.049 75.833,59.546
  other v1: 19.05,16.129 57.74,82.881
3V3_eMMC: C45.2 C46.2 C106.2 C107.2 C108.2 C109.2 C110.2 C111.2 C112.2 C113.2 C114.2 C115.2 C118.2 C119.2 C120.2 C121.2 C122.2 C123.2 C124.2 C125.2 C126.2 C127.2 C179.2 C181.2 C182.2 R132.1 R133.1 R134.1 R135.1 R136.1 R137.1 R138.1 R139.1 R140.1 R141.1 R142.1 R143.1 R144.1 R145.1 R146.1 R147.1 R148.1 R149.1 U3.F9 U3.W17 U5.F2@27.4,25.273 U5.F3@27.4,24.273 U5.F4@27.4,23.273 U5.F5@27.4,22.273 U5.F6@27.4,21.273 U5.F7@27.4,20.273 U5.F8@27.4,19.273 U5.F9@27.4,18.273 U5.H3@29.4,24.273 U5.H8@29.4,19.273 U5.L2@32.4,25.273 U5.L4@32.4,23.273 U5.L7@32.4,20.273 U5.L9@32.4,18.273 U5.P3@35.4,24.273 U5.P8@35.4,19.273 U6.F2@25.368,69.564 U6.F3@25.368,68.564 U6.F4@25.368,67.564 U6.F5@25.368,66.564 U6.F6@25.368,65.564 U6.F7@25.368,64.564 U6.F8@25.368,63.564 U6.F9@25.368,62.564 U6.H3@27.368,68.564 U6.H8@27.368,63.564 U6.L2@30.368,69.564 U6.L4@30.368,67.564 U6.L7@30.368,64.564 U6.L9@30.368,62.564 U6.P3@33.368,68.564 U6.P8@33.368,63.564 VR2.2 VR2.4 | length 109.7
  Top_1 w0.2: 43.353,48.462 44.028,49.137 44.028,52.412
  Top_1 w0.25: C45.2@38.578,37.299 v1(38.578,37.687) ; 43.353,48.462 43.353,47.394 43.502,47.245 C46.2@43.783,47.245 v1@43.783,46.892
  Top_1 w0.4: 25.38,59.741 25.38,61.337 25.352,61.364 25.327,61.364 24.868,61.823 v2(24.868,62.064) v2(24.868,63.064) ; C125.2@25.406,69.564 25.381,69.564 24.881,69.064 v2(24.868,69.064) 24.868,68.473 ; C120.2@25.412,64.516 24.868,64.516 ; C127.2@25.412,66.548 24.975,66.548 24.868,66.441 ; C123.2@25.412,68.58 24.975,68.58 24.868,68.473 ; v2(26.868,63.064) v2(24.868,63.064) ; v2(26.9,24.773) 26.9,24.182 ; v2@26.932,24.773 C114.2@27.416,25.257 ; 27.412,15.45 27.412,17.046 27.384,17.073 27.359,17.073 26.9,17.532 v2(26.9,17.773) v2(26.9,18.773) ; C126.2@27.428,68.564 v2(27.926,68.067) ; C108.2@27.444,20.225 26.9,20.225 ; C113.2@27.444,22.257 27.007,22.257 26.9,22.15 ; C112.2@27.444,24.289 27.007,24.289 26.9,24.182 ; v2@27.93,68.067 28.327,68.464 28.419,68.464 28.494,68.539 R145.1@28.494,68.564 ; R145.1@28.494,68.652 R143.1@28.494,69.564 ; v2(28.9,18.773) v2(26.9,18.773) ; C124.2@29.337,62.614 v2(29.93,62.137) ; C111.2@29.46,24.273 v2(29.958,23.776) ; v2(29.868,67.014) 29.899,67.014 30.295,66.618 30.367,66.618 30.442,66.543 R149.1@30.442,66.518 ; v2@29.962,23.776 30.359,24.173 30.451,24.173 30.526,24.248 R134.1@30.526,24.273 ; C122.2@30.442,64.393 30.517,64.493 v2(30.86,65.011) ; R134.1@30.526,24.361 R132.1@30.526,25.273 ; C115.2@31.369,18.323 v2(31.962,17.846) ; R137.1@31.369,20.773 31.369,20.798 31.444,20.873 31.469,20.873 31.865,21.269 31.865,21.728 R142.1@31.907,21.77 31.897,21.779 v2(31.897,22.762) ; C107.2@31.935,16.002 31.877,16.06 31.877,16.96 R139.1@31.819,17.018 ; C182.2@32.474,20.102 32.549,20.202 v2(32.892,20.72) ; v1(32.702,17.026) 32.694,17.018 R139.1@31.819,17.018 ; R136.1@32.943,17.873 32.916,17.846 v2(31.962,17.846) ; C181.2@33.106,63.514 33.206,63.589 v2(33.868,64.064) ; R146.1@33.381,68.539 33.381,68.564 33.865,69.048 v2(33.875,69.048) R144.1@33.387,69.535 ; R147.1@34.281,65.564 34.356,65.639 34.356,65.664 34.824,66.132 v2(34.961,66.132) 34.802,66.132 R148.1@34.469,66.464 ; R148.1@34.281,66.564 34.281,66.539 34.356,66.464 R148.1@34.469,66.464 ; v2@34.813,66.121 R148.1@34.469,66.464 ; C109.2@35.138,19.223 35.238,19.298 v2(35.9,19.773) ; R135.1@35.413,24.248 35.413,24.273 35.897,24.757 v2(35.907,24.757) R133.1@35.419,25.244 ; v2(24.868,63.064) 24.868,64.516 ; 24.868,64.516 v2(24.868,65.064) v2(24.868,66.064) 24.868,66.441 ; 24.868,66.441 v2(24.868,67.064) v2(24.868,68.064) 24.868,68.473 ; v2(26.9,18.773) 26.9,20.225 ; 26.9,20.225 v2(26.9,20.773) v2(26.9,21.773) 26.9,22.15 ; 26.9,22.15 v2(26.9,22.773) v2(26.9,23.773) 26.9,24.182 ; R139.1@31.819,17.018 31.819,17.703 v2(31.962,17.846)
  Top_1 w0.5: VR2.2@75.946,16.785 75.946,19.304 ; C179.2@76.719,25.527 76.719,23.358 VR2.4@75.946,22.585 ; C179.2@76.73,25.517 v1(80.313,25.517) ; VR2.4@77.292,21.76 77.292,20.65 75.946,19.304 ; 75.946,19.304 VR2.4@75.946,22.585 ; 75.946,19.304 74.6,20.65 74.6,21.76 75.425,22.585 VR2.4@75.946,22.585
  Bottom_6 w0.25: v1(38.578,37.687) U3.W17@38.578,38.062 ; U3.F9@43.778,46.512 v1(43.778,46.887)
  Bottom_6 w0.4: v2(24.868,62.064) U6.F9@25.368,62.564 v2(24.868,63.064) U6.F8@25.368,63.564 v2(24.868,64.064) U6.F7@25.368,64.564 v2(24.868,65.064) U6.F6@25.368,65.564 v2(24.868,66.064) U6.F5@25.368,66.564 v2(24.868,67.064) U6.F4@25.368,67.564 v2(24.868,68.064) U6.F3@25.368,68.564 v2(24.868,69.064) U6.F2@25.368,69.564 ; v2(26.868,63.064) U6.H8@27.368,63.564 ; v2(26.9,17.773) U5.F9@27.4,18.273 v2(26.9,18.773) U5.F8@27.4,19.273 v2(26.9,19.773) U5.F7@27.4,20.273 v2(26.9,20.773) U5.F6@27.4,21.273 v2(26.9,21.773) U5.F5@27.4,22.273 v2(26.9,22.773) U5.F4@27.4,23.273 v2(26.9,23.773) U5.F3@27.4,24.273 v2(26.9,24.773) U5.F2@27.4,25.273 ; U6.H3@27.406,68.564 27.406,68.551 27.89,68.067 v2(27.926,68.067) ; v2(28.9,18.773) U5.H8@29.4,19.273 ; U5.H3@29.438,24.273 29.438,24.26 29.922,23.776 v2(29.958,23.776) ; v2(29.868,67.014) 29.868,67.04 30.368,67.54 U6.L4@30.368,67.564 ; v2(29.868,70.064) U6.L2@30.368,69.564 ; v2(29.93,62.137) 30.357,62.564 U6.L9@30.368,62.564 ; U6.L7@30.368,64.564 30.392,64.564 30.839,65.011 v2(30.86,65.011) ; v2(31.897,22.762) 32.4,23.265 U5.L4@32.4,23.273 ; v2(31.9,25.773) U5.L2@32.4,25.273 ; v2(31.962,17.846) 32.389,18.273 U5.L9@32.4,18.273 ; U5.L7@32.4,20.273 32.424,20.273 32.871,20.72 v2(32.892,20.72) ; U6.P8@33.368,63.564 v2(33.868,64.064) ; U6.P3@33.368,68.564 v2@33.868,69.064 ; U5.P8@35.4,19.273 v2(35.9,19.773) ; U5.P3@35.4,24.273 v2@35.9,24.773
  other v1: 80.264,24.765 80.315,26.06
5V: C1.2 C4.2 C10.2 C12.2 C14.2 C15.2 C174.2 C175.2 C177.2 C180.2 L5.2 R12.2 R210.1 U1.4 U1.10 U1.15 U1.20 U1.26 U1.31 VR1.3 VR2.3 | length 41.8
  Top_1 w0.15: v2(62.67,64.287) 63.347,64.287 63.627,64.567 R12.2@63.627,65.971
  Top_1 w0.5: C175.2@74.811,12.573 74.875,12.509 77.408,12.509 ; C174.2@77.408,11.43 77.408,12.509 ; v1(78.13,59.944) 77.083,61.47 C177.2@77.052,61.506 ; VR2.3@78.246,16.785 78.205,16.744 78.205,15.253 77.558,14.606 77.558,13.738 C180.2@77.408,13.589 77.408,12.509 ; C177.2@77.052,61.506 77.052,61.551 C177.2@76.733,61.87 C177.2@77.052,61.506
  Bottom_6 w0.2: v1(60.637,74.484) 60.642,74.479 61.096,74.479 ; C14.2@61.087,75.303 61.096,75.293 61.096,74.479 ; U1.4@61.106,73.493 61.096,73.503 61.096,74.479 ; R210.1@73.195,24.681 72.405,24.681 71.876,24.152 71.876,15.822 73.986,13.712 74.278,13.712 L5.2@75.653,12.337
  Bottom_6 w0.254: v2@57.421,68.822 ccw(c57.415,69.076) 57.595,68.896 58.331,69.632 cw(c58.51,69.452) 58.484,69.705 58.633,69.72 U1.26@58.856,69.743 ; v2@57.421,73.165 cw(c57.415,72.911) 57.595,73.09 58.331,72.354 ccw(c58.51,72.534) 58.484,72.281 58.633,72.266 U1.31@58.856,72.243 ; C15.2@61.229,66.922 61.34,67.059 61.609,67.541 61.609,68.27 U1.20@61.606,68.493 ; U1.15@63.856,69.743 64.079,69.72 64.227,69.705 cw(c64.201,69.452) 64.38,69.632 65.117,68.896 ccw(c65.296,69.076) v2(65.291,68.822) ; U1.10@63.856,72.243 64.079,72.266 64.227,72.281 ccw(c64.201,72.534) 64.38,72.354 65.117,73.09 cw(c65.296,72.911) v2(65.291,73.165)
  Bottom_6 w0.5: v1(78.13,59.944) 78.13,61.024 VR1.3@78.133,61.849
  other v1: 74.104,10.186 75.137,10.187 76.171,10.187 77.204,10.187
  other v2: 60.81,64.268 61.43,64.268 62.05,64.287 56.496,68.822 56.946,68.822 57.421,68.822 65.766,68.822 66.216,68.822 56.496,73.165 56.946,73.165 57.421,73.165 65.766,73.165 66.216,73.165
12V: C165.2 C166.2 C173.2 D5.1 R200.2 R201.2 SB2.2 U22.6 U23.7 | length 7.3
  Top_1 w0.5: C173.2@76.719,32.004 76.454,32.269 v1(76.454,33.401) v1(77.343,33.401)
  Bottom_6 w0.254: v2@71.067,73.084 72.581,73.084 ; R200.2@72.581,72.618 72.581,73.084 ; R201.2@72.581,73.634 72.581,73.084
  Bottom_6 w0.5: U23.7@76.464,31.895 76.464,33.391 v1(76.454,33.401) v1(77.343,33.401)
  other v2: 73.158,65.831 75.553,65.827 73.141,68.281 75.571,68.3 71.06,71.566 71.06,72.074 71.06,72.583 71.06,73.091
12V_CONN: C167.2 C168.2 J4.1 J4.2 J6.1 J6.2 J6.3 R203.1 R206.2 SB2.1 U22.5 | length 4.3
  Top_1 w0.2: v2(71.8,70.535) 72.173,70.907 73.615,70.907 73.732,70.79 73.732,70.282 C168.2@73.665,70.215
  Bottom_6 w0.2: v2(71.8,70.535) 71.803,70.532 72.527,70.532 R203.1@72.581,70.586 ; v1(78.787,75.791) 78.801,75.805 79.546,75.805 R206.2@79.56,75.819
  other v2: 75.277,69.438 75.956,73.545 77.07,73.545 75.399,74.168 76.513,74.168
ADC_TEMP_1: R90.2
ADC_TEMP_2: R92.2
ADC_TEMP_3: R94.2
AUXOFF: R200.1 U22.3 | length 1.4
  Bottom_6 w0.254: R200.1@73.556,72.464 73.556,72.441 73.602,72.395 73.774,72.395 74.397,71.772 U22.3@74.671,71.772
BUS_3V3: H2.27 H2.28
BUS_5V: H2.25 H2.26
CAN_A7_H: H1.03 J6.9 R178.1 R235.2 | length 119.6
  Top_1 w0.134: 20.066,24.962 20.06,24.956 R178.1@20.06,22.708 20.046,22.708 19.582,22.244 19.582,21.647 18.995,21.059 13.477,21.059 12.777,20.359 12.777,18.007 H1.03@11.19,16.42 12.326,15.284 12.326,13.34 13.462,12.204 13.462,10.668 14.844,9.286 18.781,9.286 22.127,5.94 70.283,5.94 73.488,9.145 80.01,9.145 81.407,10.542 81.407,29.096 82.22,29.909 84.257,29.909 J6.9@84.783,30.435
  Bottom_6 w0.134: H1.03@11.19,16.42 11.541,16.42 12.049,16.927 13.509,16.927 13.901,16.535 R235.2@13.901,16.51
CAN_A7_L: H1.01 J6.8 R180.2 R234.2 | length 126.1
  Top_1 w0.134: 18.796,24.962 R180.2@18.796,22.708 18.796,22.692 19.281,22.207 19.281,21.81 18.857,21.386 13.385,21.386 12.493,20.494 12.493,18.2 11.769,17.476 10.662,17.476 10.064,16.879 10.064,15.006 13.138,11.932 13.138,10.509 14.679,8.968 18.65,8.968 21.912,5.706 70.498,5.706 73.62,8.827 80.023,8.827 81.725,10.529 81.725,29.083 82.233,29.591 84.127,29.591 J6.8@84.783,28.935
  Bottom_6 w0.134: H1.01@11.19,13.88 10.079,14.991 10.079,16.874 10.662,17.456 11.882,17.456 12.13,17.207 13.48,17.207 13.901,17.628 R234.2@13.901,17.653
CAN_AX_H: J12.07 R184.1 R235.1 | length 39.8
  Top_1 w0.134: J12.07@14.83,17.1 15.527,17.1 15.891,17.464 16.302,17.464 18.897,17.464 23.114,21.681 23.114,42.024 25.805,44.715 25.805,45.231 26.269,45.695 R184.1@26.283,45.695 26.283,47.943 26.289,47.949
  Bottom_6 w0.134: R235.1@14.801,16.51 14.814,16.51 15.81,17.506 16.091,17.506 16.273,17.323 v1(16.302,17.323)
CAN_AX_L: J12.08 R186.2 R234.1 | length 39.3
  Top_1 w0.134: J12.08@14.83,18.1 15.527,18.1 15.847,17.78 v1@16.302,17.78 ; v1@16.302,17.926 16.318,17.909 16.318,17.78 18.766,17.78 22.798,21.812 22.798,42.128 25.504,44.834 25.504,45.194 25.019,45.679 R186.2@25.019,45.695 25.019,47.949
  Bottom_6 w0.134: R234.1@14.801,17.653 14.814,17.653 15.138,17.33 15.249,17.33 15.692,17.773 16.075,17.773 16.249,17.947 v1(16.321,17.947)
CLK_EXP_CONNECTOR: J16.4 R240.2 | length 1.9
  Bottom_6 w0.1: J16.4@59.885,8.217 59.889,8.221 R240.2@59.889,10.091
CLK_EXP_PC104: H1.23 R221.2 | length 76.8
  Top_1 w0.1: v1(21.098,10.287) 22.914,8.471 58.257,8.471 v1(59.193,9.407) 59.193,9.413 59.871,10.091 R221.2@59.889,10.091
  Bottom_6 w0.1: H1.23@11.19,41.82 12.233,40.777 12.233,33.944 16.405,29.771 16.405,24.822 15.306,23.722 15.306,21.657 20.525,16.437 20.525,10.86 v1(21.098,10.287)
CS_EXP_CONNECTOR: J16.3 R239.2 | length 1.9
  Bottom_6 w0.1: J16.3@61.386,8.217 R239.2@61.386,10.091
CS_EXP_PC104: H1.21 R220.2 | length 78.6
  Top_1 w0.1: v1(21.336,9.525) 22.718,8.143 59.444,8.143 v1(60.708,9.407) 60.708,9.413 R220.2@61.386,10.091 R220.2@61.404,10.091
  Bottom_6 w0.1: H1.21@11.19,39.28 9.878,37.968 9.878,33.81 10.745,32.943 12.777,32.943 16.103,29.617 16.103,24.914 15.013,23.824 15.013,21.595 20.224,16.384 20.224,10.637 v1(21.336,9.525)
DCDC1: C2.1 L1.2 R14.1 U1.9 | length 7.6
  Bottom_6 w0.254: L1.2@68.013,74.795 68.506,74.795 ; L1.2@68.013,76.941 68.506,76.941
  Bottom_6 w0.3: U1.9@63.881,72.737 63.881,73.079 cw(c64.181,73.079) 63.968,73.291 64.638,73.96 cw(c64.85,73.748) 64.85,74.048 67.199,74.048 cw(c67.199,73.748) 67.479,73.856 67.502,73.797 C2.1@67.579,73.597 ; 68.472,73.586 v1@69.071,73.586 ; 68.693,75.362 68.744,75.413 v1@69.344,75.413 ; 68.776,74.196 v1@69.376,74.196
  other v1: 69.074,73.584 69.378,74.193 69.346,75.411 68.87,76.581
DCDC2: C5.1 L2.2 R15.1 U1.16 | length 4.8
  Bottom_6 w0.3: U1.16@63.856,69.249 63.856,68.872 ccw(c64.156,68.872) 63.943,68.659 64.577,68.026 ccw(c64.789,68.238) 64.789,67.938 67.179,67.938 ccw(c67.179,68.238) 67.459,68.13 67.502,68.241 C5.1@67.579,68.441
DCDC3: C11.1 L3.2 R16.1 U1.25 | length 4.7
  Bottom_6 w0.3: C11.1@55.26,68.441 55.337,68.241 55.366,68.166 ccw(c55.646,68.274) 55.548,67.991 ccw(c55.668,68.34) 55.668,67.971 58.076,67.971 ccw(c58.076,68.271) 58.287,68.058 58.776,68.546 ccw(c58.563,68.758) 58.863,68.758 U1.25@58.863,69.257
DCDC4: C13.1 L4.2 R17.1 U1.32 | length 7.6
  Bottom_6 w0.254: 54.339,76.941 L4.2@54.833,76.941 ; 54.402,74.795 L4.2@54.833,74.795
  Bottom_6 w0.3: v1@53.469,74.196 54.069,74.196 ; v1@53.502,75.414 54.101,75.414 54.153,75.362 ; v1@53.774,73.586 54.374,73.586 ; C13.1@55.26,73.597 55.337,73.797 55.348,73.824 cw(c55.628,73.716) 55.628,74.016 58.154,74.016 cw(c58.154,73.716) 58.366,73.928 58.776,73.518 cw(c58.563,73.307) 58.863,73.307 U1.32@58.863,72.729
  other v1: 53.772,73.584 53.467,74.193 53.499,75.411 53.975,76.581
DDR_A0: U3.W6 U4.N3 | length 34.1
  Top_1 w0.125: v1(46.094,37.712) 46.079,37.697 46.079,37.354 46.03,37.305 46.03,35.064 45.828,34.862 45.828,25.662 45.928,25.562 49.828,25.562 49.928,25.662 49.928,25.962 49.828,26.062 47.128,26.062 47.028,26.162 47.028,26.462 47.128,26.562 50.428,26.562 52.428,28.562 54.028,28.562 54.303,28.837 54.303,29.087 54.478,29.262 54.628,29.262 56.828,29.262 56.928,29.362 56.928,29.662 56.828,29.762 55.578,29.762 v1(55.478,29.662)
  Bottom_6 w0.125: U3.W6@45.728,38.062 45.736,38.062 46.086,37.712 v1(46.094,37.712) ; v1(55.478,29.662) U4.N3@55.878,29.262
DDR_A1: U3.P6 U4.P7 | length 34
  Top_1 w0.125: v1(46.034,40.973) 46.345,40.662 47.628,40.662 47.928,40.362 50.328,40.362 50.628,40.662 56.628,40.662 56.728,40.562 56.728,40.262 56.628,40.162 54.028,40.162 53.928,40.062 53.928,39.762 54.028,39.662 61.328,39.662 61.428,39.562 61.428,36.562 59.328,34.462 59.328,29.812 v1(59.478,29.662)
  Bottom_6 w0.125: U3.P6@45.728,41.312 45.728,41.295 46.034,40.99 v1(46.034,40.973) ; U4.P7@59.078,30.062 v1(59.478,29.662)
DDR_A2: U3.V5 U4.P3 | length 34
  Top_1 w0.125: v1(46.703,38.387) 46.703,38.333 46.857,38.178 46.857,37.721 47.016,37.562 47.016,35.45 46.828,35.262 46.828,34.562 46.628,34.362 46.628,28.462 46.728,28.362 51.128,28.362 51.228,28.462 51.228,28.762 51.128,28.862 47.128,28.862 47.028,28.962 47.028,29.262 47.128,29.362 49.828,29.362 50.028,29.562 50.028,29.862 50.228,30.062 50.428,30.062 50.928,29.562 51.628,29.562 52.085,30.019 52.551,30.019 52.987,30.455 53.909,30.455 54.302,30.062 56.828,30.062 56.928,30.162 56.928,30.462 56.828,30.562 55.578,30.562 v1(55.478,30.462)
  Bottom_6 w0.125: U3.V5@46.378,38.712 v1(46.703,38.387) ; v1(55.478,30.462) 55.803,30.462 55.878,30.387 U4.P3@55.878,30.062
DDR_A3: U3.V6 U4.N2 | length 34
  Top_1 w0.125: v1(46.065,38.387) 46.632,37.82 46.632,37.629 46.791,37.471 46.791,35.825 46.428,35.462 46.428,34.762 46.228,34.562 46.228,26.062 46.328,25.962 46.628,25.962 46.728,26.062 46.728,26.862 46.828,26.962 50.328,26.962 50.428,27.062 50.428,27.362 50.328,27.462 46.728,27.462 46.628,27.562 46.628,27.862 46.728,27.962 50.428,27.962 50.728,27.662 50.928,27.662 51.328,28.062 52.128,28.862 52.128,29.462 52.228,29.562 52.628,29.562 52.728,29.462 52.728,29.062 52.928,28.862 53.878,28.862 54.053,29.037 54.053,29.512 54.203,29.662 v1(54.678,29.662)
  Bottom_6 w0.125: U3.V6@45.728,38.712 45.734,38.712 46.059,38.387 v1(46.065,38.387) ; v1(54.678,29.662) U4.N2@55.078,29.262
DDR_A4: U3.R6 U4.P8 | length 34
  Top_1 w0.125: v1(45.403,40.987) 45.78,41.364 47.726,41.364 48.128,40.962 49.928,40.962 50.428,41.462 60.228,41.462 60.328,41.362 60.328,41.062 60.228,40.962 59.928,40.962 59.828,40.862 59.828,40.562 59.928,40.462 62.078,40.462 62.228,40.312 62.228,36.262 60.028,34.062 60.028,30.962 59.89,30.824 59.89,30.299 60.103,30.087 60.803,30.087 60.928,29.962 60.928,29.362 60.803,29.237 60.403,29.237 60.278,29.362 v1(60.278,29.662)
  Bottom_6 w0.125: v1(45.403,40.987) U3.R6@45.728,40.662 ; U4.P8@59.878,30.062 v1(60.278,29.662)
DDR_A5: U3.W4 U4.P2 | length 33.9
  Top_1 w0.125: v1(47.327,37.754) 47.327,35.243 47.128,35.044 47.128,34.262 47.028,34.162 47.028,29.862 47.128,29.762 47.428,29.762 47.528,29.862 47.528,33.162 47.628,33.262 47.928,33.262 48.028,33.162 48.028,29.862 48.128,29.762 48.428,29.762 48.528,29.862 48.528,33.162 48.628,33.262 48.928,33.262 49.028,33.162 49.028,29.862 49.128,29.762 49.528,29.762 49.628,29.862 49.628,30.362 49.828,30.562 50.571,30.562 51.083,30.05 51.5,30.05 51.912,30.462 52.328,30.462 52.728,30.862 52.728,31.762 53.028,32.062 53.828,32.062 54.053,31.837 54.053,30.787 54.378,30.462 v1(54.678,30.462)
  Bottom_6 w0.125: U3.W4@47.028,38.062 47.028,38.057 47.327,37.758 v1(47.327,37.754) ; v1(54.678,30.462) 54.678,30.137 54.753,30.062 U4.P2@55.078,30.062
DDR_A6: U3.P7 U4.R8 | length 34
  Top_1 w0.125: v1@45.404,41.637 45.901,41.637 45.951,41.587 48.103,41.587 48.378,41.862 62.378,41.862 62.528,41.712 62.528,41.512 62.378,41.362 60.853,41.362 60.728,41.237 60.728,40.987 60.853,40.862 62.403,40.862 62.528,40.737 62.528,35.962 60.328,33.762 60.328,30.912 60.278,30.862 v1(60.278,30.462)
  Bottom_6 w0.125: U3.P7@45.078,41.312 v1(45.403,41.636) ; U4.R8@59.878,30.862 59.878,30.562 59.978,30.462 v1(60.278,30.462)
DDR_A7: U3.W2 U4.R2 | length 34
  Top_1 w0.125: v1(48.628,37.75) 48.616,37.762 48.303,37.762 47.853,37.312 47.853,34.237 48.028,34.062 49.928,34.062 50.028,34.162 50.028,34.462 49.928,34.562 48.328,34.562 48.228,34.662 48.228,34.962 48.328,35.062 49.878,35.062 49.978,35.162 49.978,35.462 49.878,35.562 49.178,35.562 49.053,35.687 49.053,35.962 49.153,36.062 51.653,36.062 51.953,35.762 53.591,35.762 54.091,35.262 55.328,35.262 55.428,35.162 55.428,34.862 55.328,34.762 53.578,34.762 53.328,35.012 53.328,35.262 53.228,35.362 52.328,35.362 52.228,35.262 52.228,34.962 52.328,34.862 52.928,34.862 53.028,34.762 53.028,34.462 52.928,34.362 52.128,34.362 52.028,34.262 52.028,33.962 52.128,33.862 52.928,33.862 53.028,33.762 53.028,33.462 52.928,33.362 52.128,33.362 52.028,33.262 52.028,32.862 52.128,32.762 54.553,32.762 54.678,32.637 v1(54.678,31.262)
  Bottom_6 w0.125: U3.W2@48.328,38.062 48.328,38.056 48.628,37.756 v1(48.628,37.75) ; v1(54.678,31.262) 55.003,31.262 55.078,31.187 U4.R2@55.078,30.862
DDR_A8: U3.L8 U4.T8 | length 33.4
  Top_1 w0.125: v1(44.758,43.579) 45.191,43.662 50.053,43.662 50.253,43.462 63.128,43.462 64.128,42.462 64.128,34.987 v1(61.378,32.237)
  Bottom_6 w0.125: U3.L8@44.428,43.262 44.435,43.262 44.751,43.579 v1(44.758,43.579) ; U4.T8@59.878,31.662 60.453,32.237 v1(61.378,32.237)
DDR_A9: U3.V4 U4.R3 | length 33.8